# Altium PCB FrequencyMeter.PcbDoc
Units mil, origin at the board's own origin, x right, y up, seen from the top; angles counter-clockwise.
Board outline 2755.91 x 1968.5 mil, 2 copper layers (Top Layer, Bottom Layer); 21 components, 29 nets, 82 pads, 0 vias.
Unrouted connection lines stored in the file: 48.
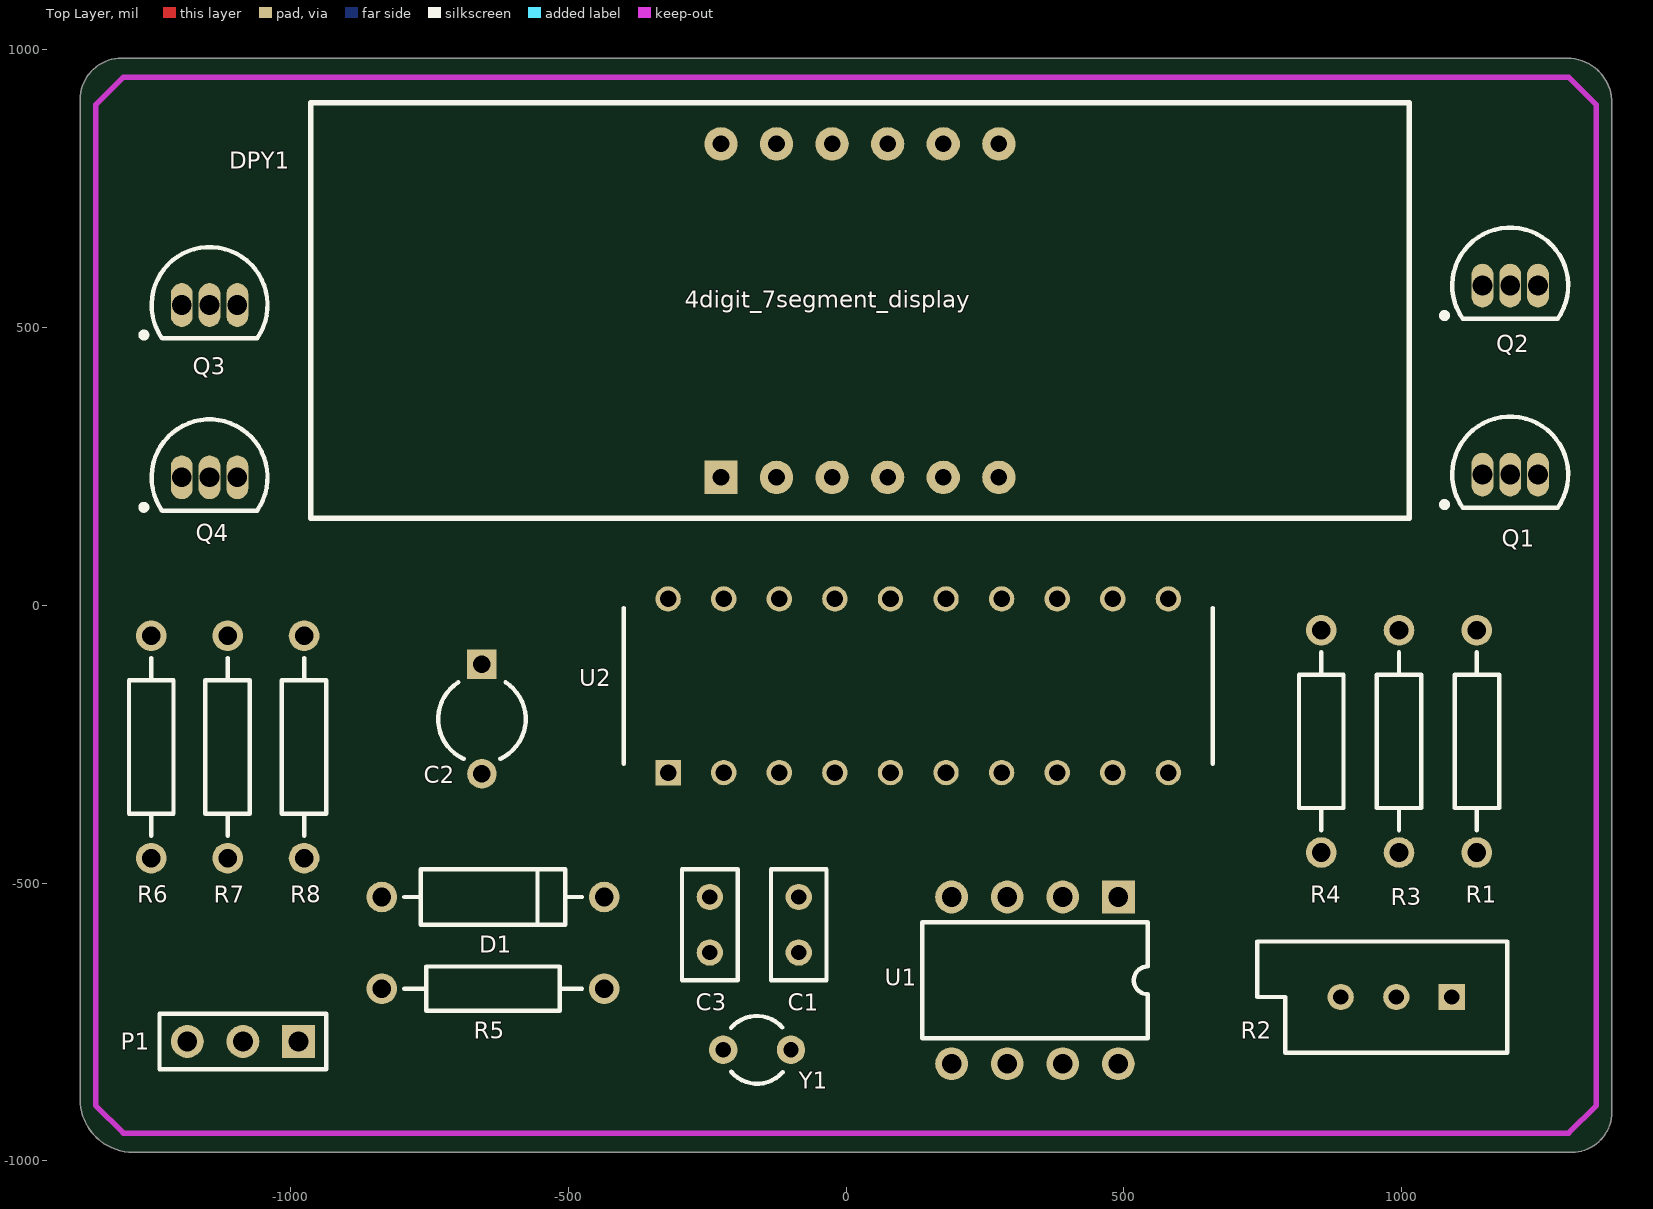
[diagram p0: Top Layer view]
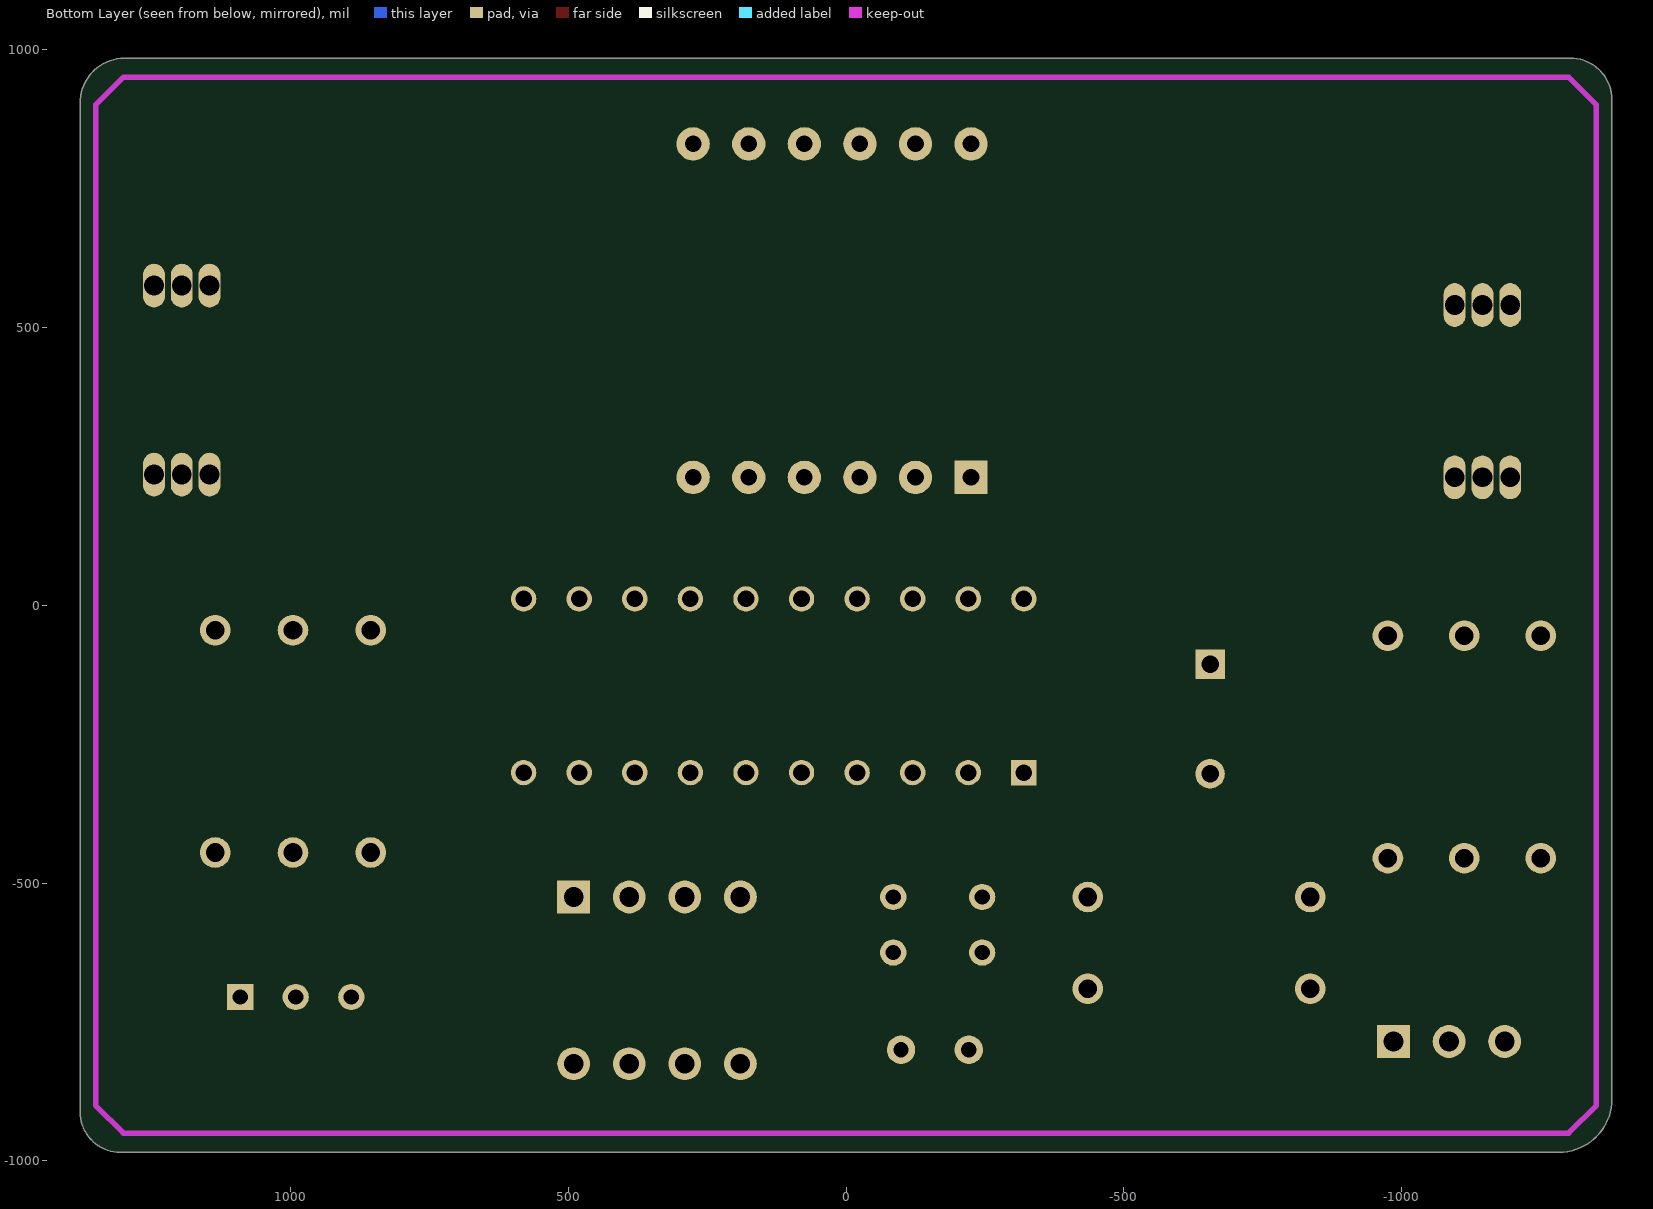
[diagram p1: Bottom Layer view, seen from below]

## Layer stack, top to bottom
Top Solder: solder mask 0.4, Solder Resist, Dk 3.5
Top Layer: signal copper 1.4
Dielectric 1: dielectric 12.6, FR-4, Dk 4.8
Bottom Layer: signal copper 1.4
Bottom Solder: solder mask 0.4, Solder Resist, Dk 3.5

## Board outline
-1377.95,-888.82 -1377.95,909.15 cw(c-1302.85,909.15) -1302.85,984.25 1297.38,984.25 1298.36,984.25 cw(c1297.38,903.68) 1377.95,902.7 1377.95,903.68 1377.95,-912.05 cw(c1305.75,-912.05) 1305.75,-984.25 -1282.52,-984.25 cw(c-1282.52,-888.82)

## Design rules (kind name [scope] priority, off if disabled: settings)
Clearance [All] p1: gap=10 ignorepadtopadclearanceinfootprint=FALSE
PolygonConnect [All] p1: connectstyle=Relief reliefconductorwidth=10 reliefentries=4 polygonreliefangle="90 Angle" airgapwidth=10
RoutingVias [All] p1: holewidth=28 width=50 viastyle="Through Hole" minholewidth=28 minwidth=50 maxholewidth=28 maxwidth=50
SolderMaskExpansion [All] p1: expansion=4
Width Width_VCC [InNet('VCC')] p1: maxlimit=50 minlimit=30 preferedwidth=30
Width Width_GND [InNet('GND')] p2: maxlimit=50 minlimit=30 preferedwidth=30
Width Width_All [All] p3: maxlimit=50 minlimit=10 preferedwidth=12
30 further rules are at their usual default settings.

## Components (designator, comment, footprint, x,y, rotation, side; value= is the part's Value field where it differs from the comment)
C1 "Cap" RAD-0.1 -85,-575 r90 top value=30pF
C2 "Cap2" CAPR5-4X5 -655,-205 r270 top value=10uF
C3 "Cap" RAD-0.1 -245,-575 r90 top value=30pF
D1 "1N4730" DIODE-0.4 -635,-525 r0 top
DPY1 "4digit_7segment_display" 4digit_7segment_display 25,530 r0 top
P1 "Header 3" HDR1X3 -985,-785 r180 top
Q1 "9012" TO-226-AA 1195,235 r270 top
Q2 "9012" TO-226-AA 1195,575 r270 top
Q3 "9012" TO-226-AA -1145,540 r270 top
Q4 "9012" TO-226-AA -1145,230 r270 top
R1 "Res2" AXIAL-0.4 1135,-245 r90 top value=4K7
R2 "Res Tap" VR5 990,-705 r180 top value=10K
R3 "Res2" AXIAL-0.4 995,-245 r90 top value=10K
R4 "Res2" AXIAL-0.4 855,-245 r90 top value=4K7
R5 "Res2" AXIAL-0.4 -635,-690 r0 top value=5K1
R6 "Res2" AXIAL-0.4 -1250,-255 r90 top value=4K7
R7 "Res2" AXIAL-0.4 -1112.5,-255 r90 top value=4K7
R8 "Res2" AXIAL-0.4 -975,-255 r90 top value=10K
U1 "LM393AN" 626-05 340,-675 r180 top
U2 "AT89C2051-24PU" DIP794W56P254L2591H533Q20N 130,-145 r90 top
Y1 "12MHz" R38 -160,-800 r270 top

## Footprints (in the part's own frame and the unit in brackets; to place one, negate y for a bottom-side part, rotate by r counter-clockwise, add the part's x,y. Pads: shape width x height; smd on the part's side, far side on the other; paste and mask are expansions set on the pad)
4digit_7segment_display [mil]
  rect 60x60 hole 30: 1(-250,-300)
  round 60 hole 30: 2(-150,-300) 3(-50,-300) 4(50,-300) 5(150,-300) 6(250,-300) 7(250,300) 8(150,300) 9(50,300) 10(-50,300) 11(-150,300) 12(-250,300)
  silkscreen extent -988,-374 988,374
626-05 [mm] "DIP; 8 Leads; Row Spacing 7.62 mm; Pitch 2.54 mm"
  rect 1.5x1.5 hole 0.9: 1(-3.81,-3.81)
  round 1.5 hole 0.9: 2(-1.27,-3.81) 3(1.27,-3.81) 4(3.81,-3.81) 5(3.81,3.81) 6(1.27,3.81) 7(-1.27,3.81) 8(-3.81,3.81)
  silkscreen extent -5.15,-2.65 5.15,2.65
AXIAL-0.4 [mm] "Axial Device, Thru-Hole; 2 Leads; 0.4 in Pin Spacing"
  round 1.4 hole 0.85: 1(-5.08,0) 2(5.08,0)
  silkscreen extent -4.06,-1.02 4.06,1.02
CAPR5-4X5 [mm] "Capacitor; 2 Leads"
  rect 1.35x1.35 hole 0.8: 1(-2.5,0)
  round 1.35 hole 0.8: 2(2.5,0)
  silkscreen extent -1.69,-2 1.82,2
DIODE-0.4 [mm] "Diode, Thru-Hole; 2 Leads; 0.4 in Pin Spacing"
  round 1.4 hole 0.85: 1(-5.08,0) 2(5.08,0)
  silkscreen extent -4.06,-1.27 4.06,1.27
DIP794W56P254L2591H533Q20N [mil]
  rect 45.63x45.63 hole 29.88: 1(-156.26,450)
  round 45.63 hole 29.88: 2(-156.26,350) 3(-156.26,250) 4(-156.26,150) 5(-156.26,50) 6(-156.26,-50) 7(-156.26,-150) 8(-156.26,-250) 9(-156.26,-350) 10(-156.26,-450) 11(156.26,-450) 12(156.26,-350) 13(156.26,-250) 14(156.26,-150) 15(156.26,-50) 16(156.26,50) 17(156.26,150) 18(156.26,250) 19(156.26,350) 20(156.26,450)
  silkscreen extent -140,-530 140,530, body extent -162,-510 162,510, height 210
HDR1X3 [mm] "Connector; Header; 3 Position"
  rect 1.5x1.5 hole 0.9: 1(0,0)
  round 1.5 hole 0.9: 2(2.54,0) 3(5.08,0)
  silkscreen extent -1.27,-1.27 6.35,1.27
R38 [mm] "Crystal, Thru-Hole; 2 Leads; Body 3.1 x 8.2 mm (Dia.xH)"
  round 1.3 hole 0.7: 1(0,1.55) 2(0,-1.55)
  silkscreen extent -1.55,-1.19 1.55,1.17
RAD-0.1 [mm] "Radial Cap, Thru-Hole; 2 Leads; 0.1 in Pin Spacing"
  round 1.2 hole 0.7: 1(-1.27,0) 2(1.27,0)
  silkscreen extent -2.54,-1.27 2.54,1.27
TO-226-AA [mm] "TO, Flat Index; 3 In-Line, Axial Leads; Body Dia. 4.8mm; Leads 0.55 x 0.51 mm (max)"
  oval 2x1 hole 0.9: 1(0,-1.27) 2(0,0) 3(0,1.27)
  silkscreen extent -2.65,-3.13 1.52,2.65, body extent -2.65,-2.66 1.52,2.66, height 5.33
VR5 [mm] "Thru-Hole; 3 Leads"
  rect 1.2x1.2 hole 0.7: 1(-2.54,0)
  round 1.2 hole 0.7: 2(0,0) 3(2.54,0)
  silkscreen extent -5.08,-2.54 6.35,2.54

## Part data
C1 C2 C3: "Capacitor", Publisher="Altium Limited"
  C1 C3: LatestRevisionDate=17-Jul-2002, LatestRevisionNote="Re-released for DXP Platform.", PackageDescription="Radial Cap, Thru-Hole; 2 Leads; 0.3 in Pin Spacing", PackageReference=RAD-0.3, Published=8-Jun-2000
  C2: PackageDescription="Capacitor; 2 Leads", PackageReference=CAPR5-4X5, Published=23-Sep-2002
D1: library part "D Zener", "Zener Diode", LatestRevisionDate=17-Jul-2002, LatestRevisionNote="Re-released for DXP Platform.", PackageDescription="Diode, Thru-Hole; 2 Leads; 0.7 in Pin Spacing", PackageReference=DIODE-0.7, Published=8-Jun-2000, Publisher="Altium Limited"
P1: "Header, 3-Pin", LatestRevisionDate=17-Jul-2002, LatestRevisionNote="Re-released for DXP Platform.", Publisher="Altium Limited"
Q1 Q2 Q3 Q4: library part PNP, "PNP Bipolar Transistor", LatestRevisionDate=29-May-2009, LatestRevisionNote="IPC-7351 Footprint Added.", PackageDescription="3-Pin SOT-23 Package 0.95 mm Pitch, 2.4 mm Lead Span", PackageReference=SOT-23B, PackageVersion=Aug-1999, Published=8-Jun-2000, Publisher="Altium Limited"
R1 R3 R4 R5 R6 R7 R8: "Resistor", LatestRevisionDate=17-Jul-2002, LatestRevisionNote="Re-released for DXP Platform.", PackageDescription="Axial Device, Thru-Hole; 2 Leads; 0.4 in Pin Spacing", PackageReference=AXIAL-0.4, Published=8-Jun-2000, Publisher="Altium Limited"
R2: "Tapped Resistor", LatestRevisionDate=17-Jul-2002, LatestRevisionNote="Re-released for DXP Platform.", PackageDescription="Variable Resistor, Thru-Hole; 3 Leads", PackageReference=VR3, Published=24-Mar-1999, Publisher="Altium Limited", Set Position=0.5, Sim Note="Enter the Resistance value and the set point into parameter fields."
U1: "Dual Comparator", ComponentLink1Description="Manufacturer Link", ComponentLink1URL=http://www.onsemi.com/site/products/taxonomy/0,4438,133,00.html, DatasheetVersion=1988, LatestRevisionDate=06-Jun-2005, LatestRevisionNote="Stylized 3D Model Added.", PackageDescription="DIP; 8 Leads; Row Spacing 7.62 mm; Pitch 2.54 mm", PackageReference=626-05, Published=17-Jul-2002, Publisher="Altium Limited"
U2: "Integrated Circuit", Manufacturer_Name=Microchip, Mouser Part Number=556-A89C2051-24PU, Datasheet Link=https://componentsearchengine.com/Datasheets/1/AT89C2051-24PU.pdf, Height=5.334mm, Manufacturer_Part_Number=AT89C2051-24PU, Mouser Price/Stock=https://www.mouser.com/Search/Refine.aspx?Keyword=556-A89C2051-24PU
Y1: library part XTAL, "Crystal Oscillator", LatestRevisionDate=17-Jul-2002, LatestRevisionNote="Re-released for DXP Platform.", PackageDescription="Crystal, Thru-Hole; 2 Leads; Body 3.1 x 8.2 mm (Dia.xH)", PackageReference=R38, Published=8-Jun-2000, Publisher="Altium Limited"

## Nets (pads, with @x,y where several pads share a name; then routed paths per layer and width w, separated by ;. In a path a pad name is that pad's centre, name@x,y a point inside that pad or via, vN(x,y) a via of type N, cw(c..) or ccw(c..) an arc to the next point about the centre after c; other vN are vias at no path point)
DG1: DPY1.12 Q4.1
DG2: DPY1.9 Q3.1
DG3: DPY1.8 Q2.1
DG4: DPY1.6 Q1.1
GND: C1.2 C3.2 D1.1 P1.2 R2.2 R8.1 U1.4 U2.10
NetP1_1: P1.1 R5.1
NetQ1_2: Q1.2 R1.2
NetQ2_2: Q2.2 R4.2
NetQ3_2: Q3.2 R6.2
NetQ4_2: Q4.2 R7.2
NetR2_3: R2.3 U1.2
NetR5_2: R5.2 U1.3
PB0: DPY1.11 U2.12
PB1: DPY1.7 U2.13
PB2: DPY1.4 U2.14
PB3: DPY1.2 U2.15
PB4: DPY1.1 U2.16
PB5: DPY1.10 U2.17
PB6: DPY1.5 U2.18
PB7: DPY1.3 U2.19
PD0: R7.1 U2.2
PD1: R6.1 U2.3
PD2: R4.1 U2.6
PD3: R1.1 U2.7
PD5: D1.2 R3.2 U1.1 U2.9
RST: C2.2 R8.2 U2.1
VCC: C2.1 P1.3 Q1.3 Q2.3 Q3.3 Q4.3 R2.1 R3.1 U1.8 U2.20
X1: C1.1 U2.5 Y1.1
X2: C3.1 U2.4 Y1.2
pads on no net: U1.5 U1.6 U1.7 U2.8 U2.11

## Keep-outs
Keep-Out Layer:
  lines w10: -1350,-900 -1350,900 -1300,950 1300,950 1350,900 1350,-900 1300,-950 -1300,-950 -1350,-900

## Silkscreen, mask and mechanical layers (free items; w line width, h text height)
Mechanical 1:
  lines w10: 1297.38,984.25 -1302.85,984.25 ccw(c-1302.85,909.15) -1377.95,909.15 -1377.95,-888.82 ccw(c-1282.52,-888.82) -1282.52,-984.25 1305.75,-984.25 ccw(c1305.75,-912.05) 1377.95,-912.05 1377.95,903.68 ; 1298.36,984.25 cw(c1297.38,903.68) 1377.95,902.7